# Altium PCB PCB1.PcbDoc
Units mil, origin at the board's own origin, x right, y up, seen from the top; angles counter-clockwise.
Board outline 3838.58 x 3838.58 mil, 2 copper layers (Top Layer, Bottom Layer); 135 components, 91 nets, 373 pads, 33 vias.
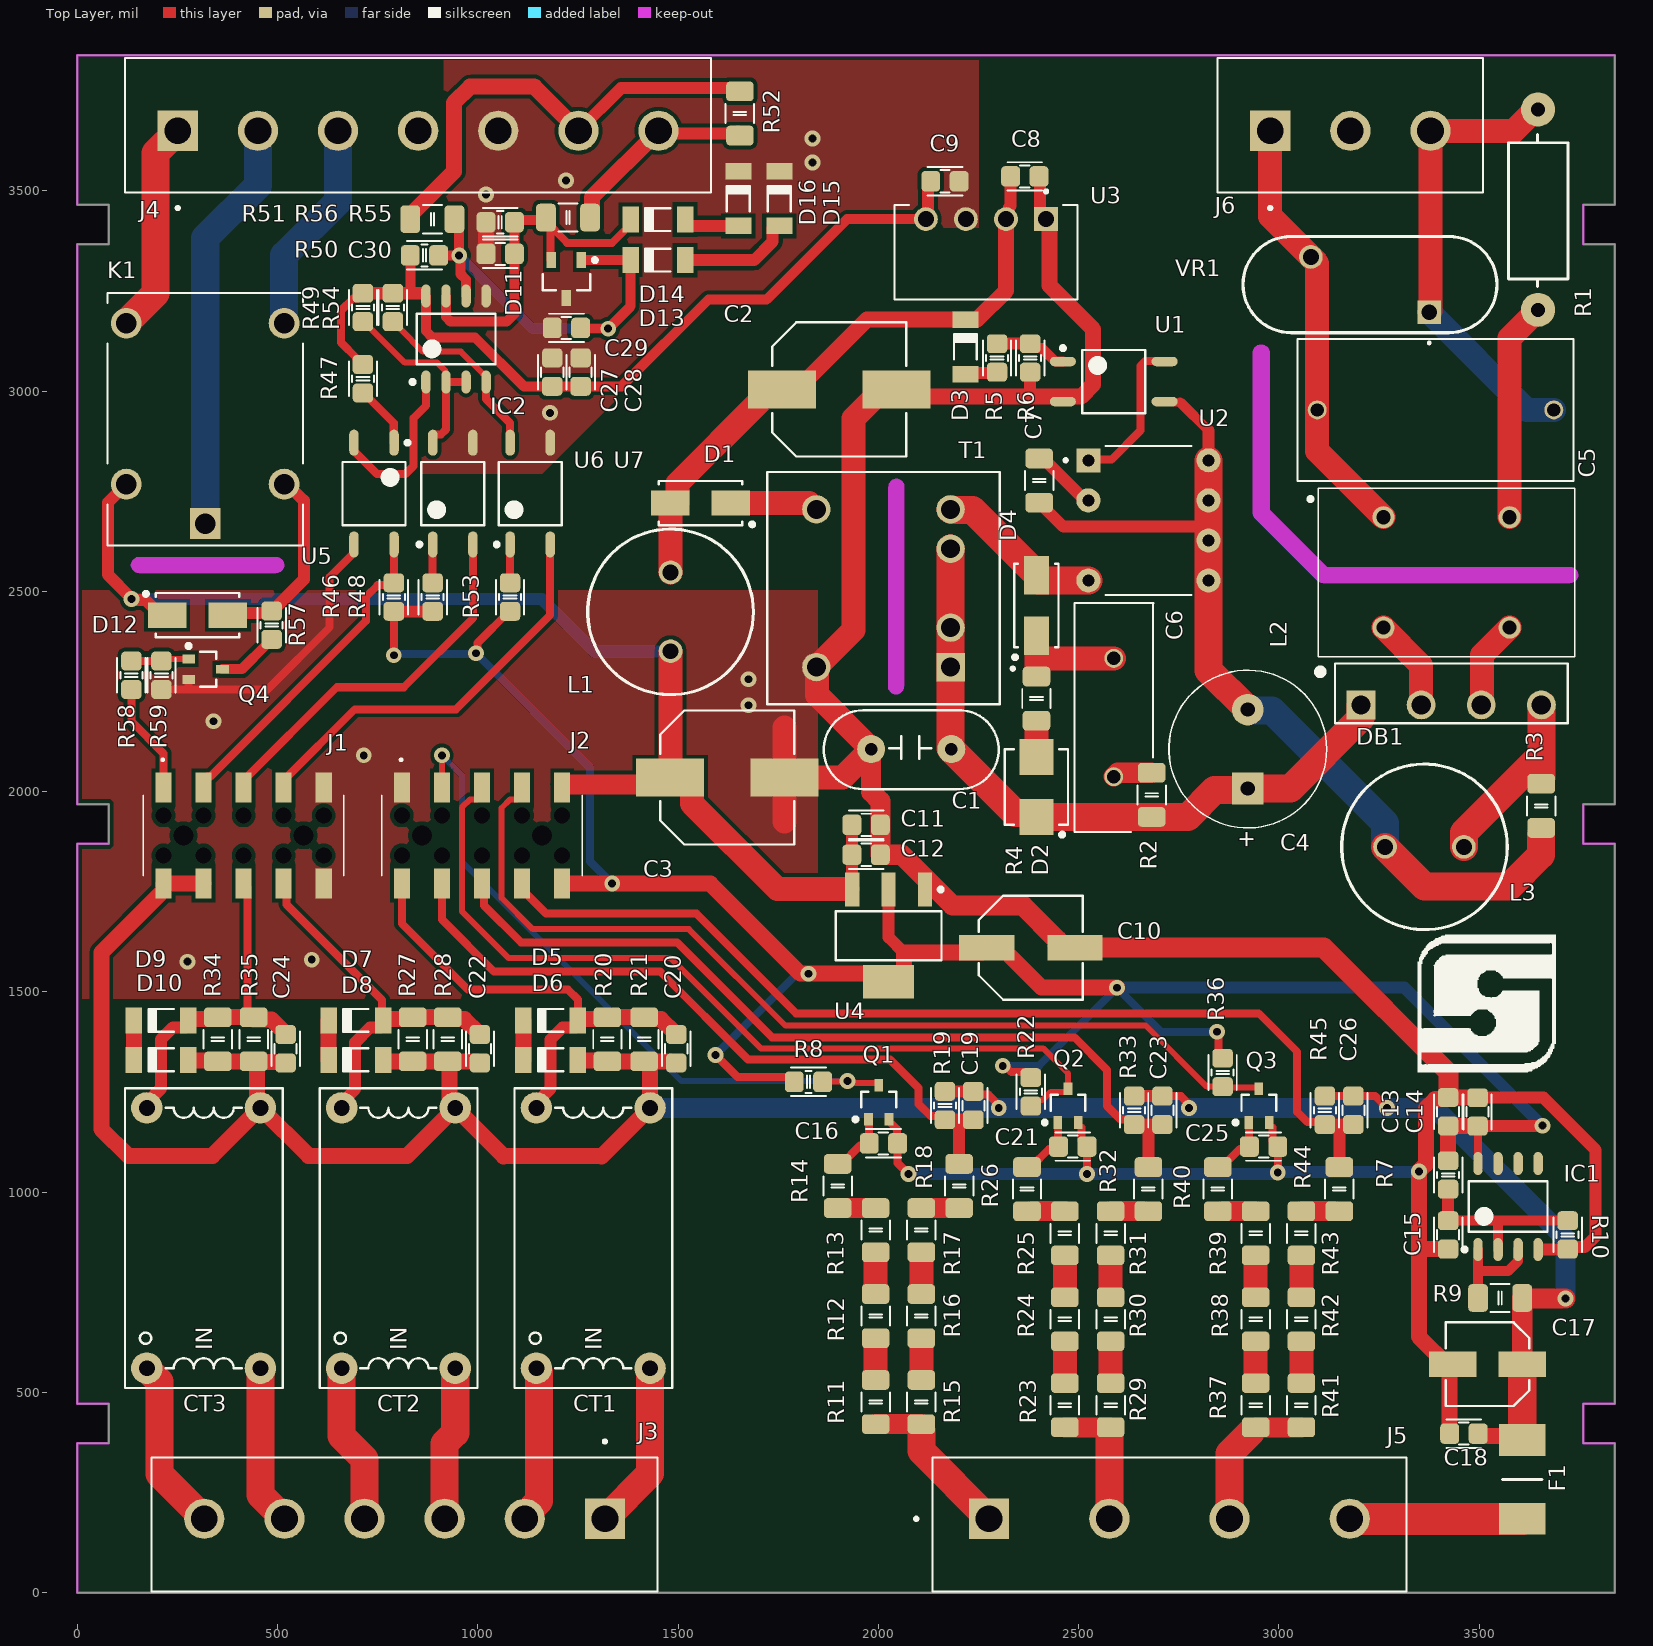
[diagram p0: Top Layer view]
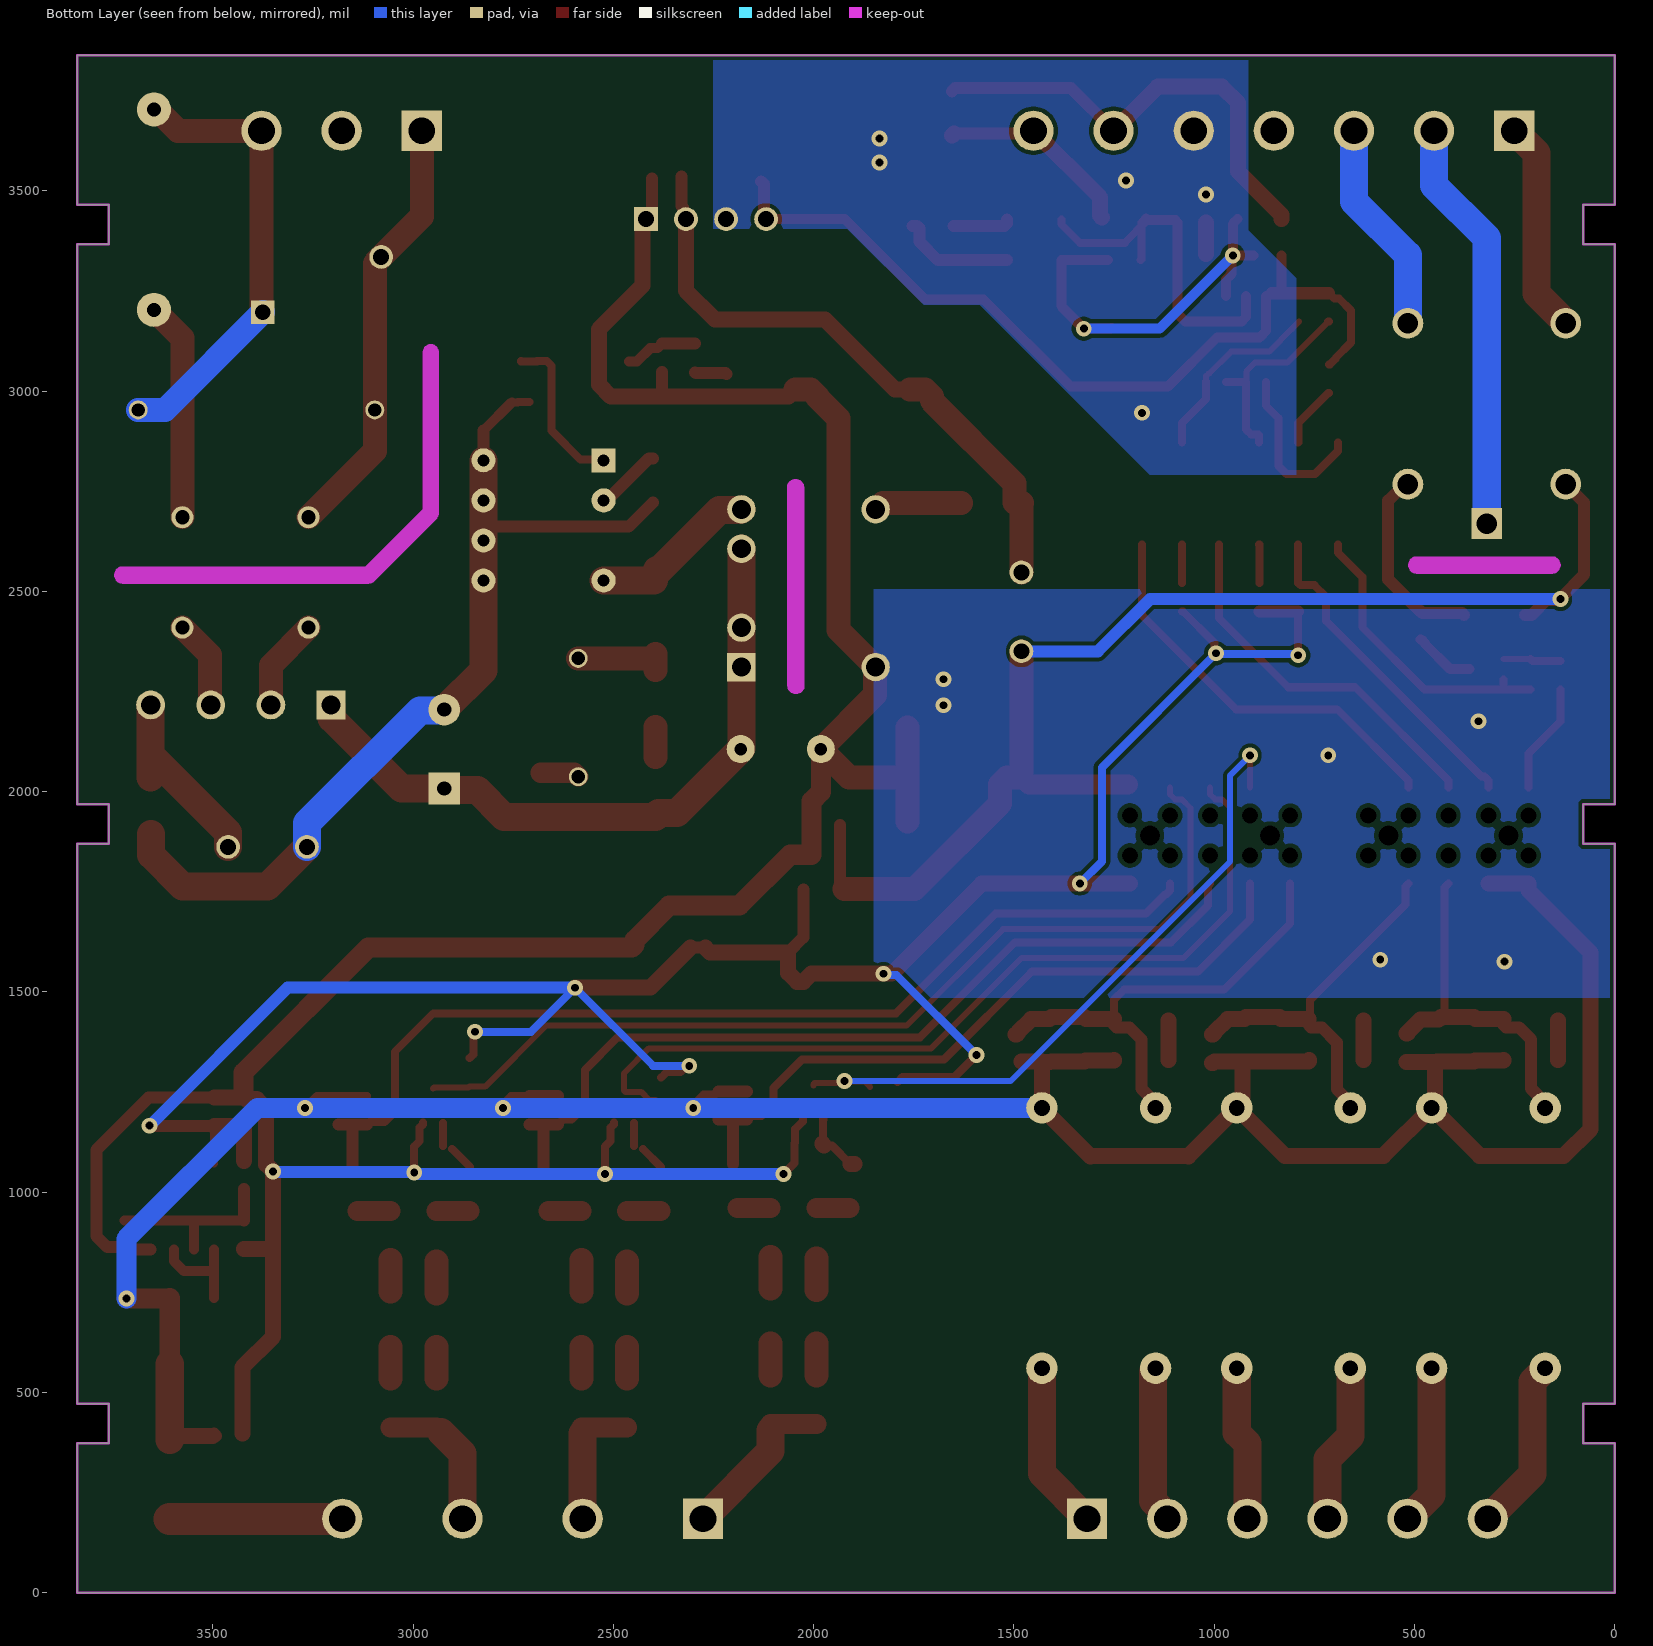
[diagram p1: Bottom Layer view, seen from below]
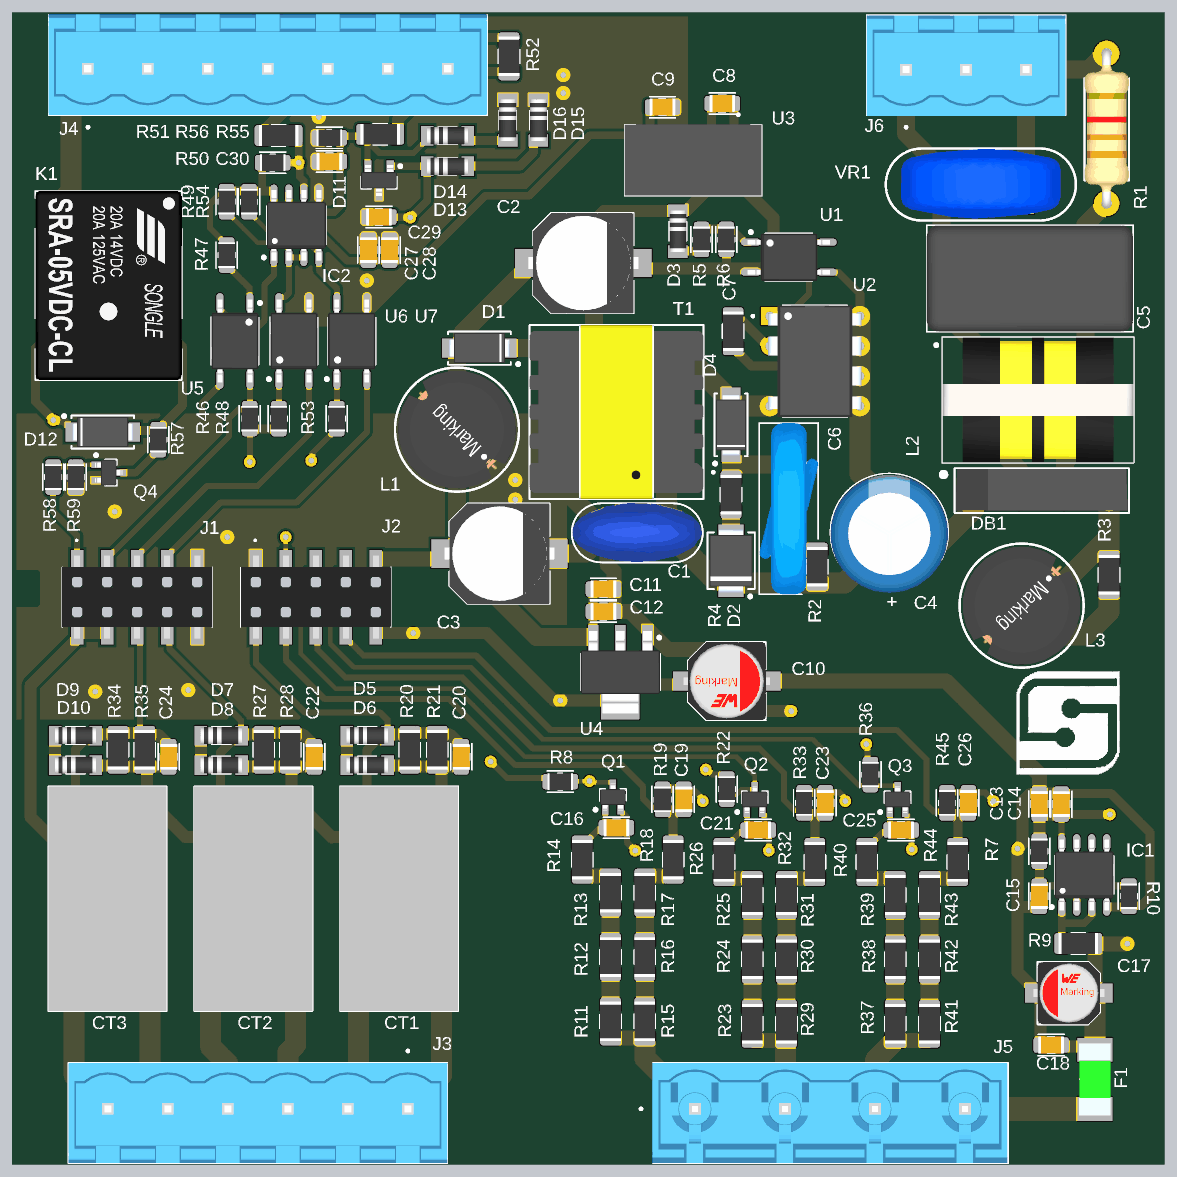
[diagram p2: 3D render of the assembled board from above, using the file's embedded part models]

## Layer stack, top to bottom
Top Solder: solder mask 0.4, Solder Resist, Dk 3.5
Top Layer: signal copper 1.4
Dielectric 1: dielectric 12.6, FR-4, Dk 4.8
Bottom Layer: signal copper 1.4
Bottom Solder: solder mask 0.4, Solder Resist, Dk 3.5

## Board outline
0,374.02 78.74,374.02 78.74,472.44 0,472.44 0,1870.08 78.74,1870.08 78.74,1968.5 0,1968.5 0,3366.14 78.74,3366.14 78.74,3464.57 0,3464.57 0,3838.58 3838.58,3838.58 3838.58,3464.57 3759.84,3464.57 3759.84,3366.14 3838.58,3366.14 3838.58,1968.5 3759.84,1968.5 3759.84,1870.08 3838.58,1870.08 3838.58,472.44 3759.84,472.44 3759.84,374.02 3838.58,374.02 3838.58,0 0,0
cut-out: 2024.28,2263.82 ccw(c2044.29,2263.78) 2064.31,2263.74 2065.29,2759.8 2065.29,2759.84 ccw(c2045.28,2759.84) 2025.26,2759.88
cut-out: 155.63,2545.61 cw(c155.63,2565.63) 155.63,2585.64 495.63,2585.64 cw(c495.63,2565.63) 515.64,2565.63 cw(c495.63,2565.63) 495.63,2545.61
cut-out: 2941.51,2681.44 cw(c2955.63,2695.63) 2935.61,2695.63 2935.61,3095.63 cw(c2955.63,3095.63) 2975.64,3095.63 2975.64,2703.92 3118.92,2560.64 3725.63,2560.64 cw(c3725.63,2540.63) 3745.64,2540.63 cw(c3725.63,2540.63) 3725.63,2520.61 3110.63,2520.61 cw(c3110.63,2540.63) 3096.44,2526.51 3096.48,2526.48

## Design rules (kind name [scope] priority, off if disabled: settings)
Clearance [All] p1: gap=10 ignorepadtopadclearanceinfootprint=FALSE
MinimumSolderMaskSliver [All] p1: minsoldermaskwidth=5
PolygonConnect [All] p1: connectstyle=Direct reliefconductorwidth=20 reliefentries=4 polygonreliefangle="90 Angle" airgapwidth=10
RoutingVias [All] p1: holewidth=19.68 width=39.37 viastyle="Through Hole" minholewidth=19.68 minwidth=35.43 maxholewidth=19.68 maxwidth=39.37
SilkToSilkClearance [All] p1: silktosilkclearance=3
SilkToSolderMaskClearance [IsPad] p1: minsilkscreentomaskgap=3 clearancetoexposedcopper=TRUE
SolderMaskExpansion [All] p1: expansion=4 istentingtop=FALSE
SupplyNets "Schematic Supply Nets_5" [InNet('+5V')] p1: voltage=0.000
SupplyNets "Schematic Supply Nets_4" [InNet('N')] p2: voltage=0.000
SupplyNets "Schematic Supply Nets_3" [InNet('GND')] p3: voltage=0.000
SupplyNets "Schematic Supply Nets_2" [InNet('+5V_RS485')] p4: voltage=0.000
SupplyNets "Schematic Supply Nets_1" [InNet('GND_RS485')] p5: voltage=0.000
SupplyNets "Schematic Supply Nets" [InNet('+3.3V')] p6: voltage=0.000
Width [All] p1: maxlimit=100 minlimit=10 preferedwidth=40 toplayer_prefwidth=20 minimp=50.000000 maximp=50.000000 favimp=50.000000
27 further rules are at their usual default settings.

## Classes and differential pairs
component class Sheet5: C27 C28 C29 C30 D11 D12 D13 D14 D15 D16 IC2 J1 J2 J3 J4 J5 J6 K1 Q4 R46 R47 R48 R49 R50 R51 R52 R53 R54 R55 R56 R57 R58 R59 U5 U6 U7
component class Sheet3: C15 C16 C17 C18 C19 C20 CT1 D5 D6 F1 IC1 Q1 R7 R8 R9 R10 R11 R12 R13 R14 R15 R16 R17 R18 R19 R20 R21
component class Sheet4: C21 C22 C23 C24 C25 C26 CT2 CT3 D7 D8 D9 D10 Q2 Q3 R22 R23 R24 R25 R26 R27 R28 R29 R30 R31 R32 R33 R34 R35 R36 R37 R38 R39 R40 R41 R42 R43 R44 R45
component class Sheet2: C1 C2 C3 C4 C5 C6 C7 C8 C9 C10 C11 C12 C13 C14 D1 D2 D3 D4 DB1 L1 L2 L3 R1 R2 R3 R4 R5 R6 T1 U1 U2 U3 U4 VR1

## Components (designator, comment, footprint, x,y, rotation, side; value= is the part's Value field where it differs from the comment)
C1 "2.2n/2KV" CN2-B 2082.09,2111.3 r0 top
C2 "330u/6.3V" CAPAE9383X105M 1902.56,3003.94 r0 top
C3 "330u/6.3V" CAPAE9383X105M 1623.03,2035.43 r0 top
C4 "10u/450V" CA-ALU-10BL 2922.24,2106.3 r90 top
C5 "0.1u/660V" CAPRR1500W60L1750T900H1600 3390.75,2952.76 r0 top
C6 "10n/2KV" CAPRB750W60L1450T500H1850 2587.6,2185.04 r270 top
C7 "0.1u/50V" RES_C_3216X70 2401.57,2776.57 r90 top
C8 "4.7u/6.3V" CAP_C_2012X110 2365.63,3535.63 r180 top
C9 "10u/6.3V" CAP_C_2012X110 2166.34,3523.62 r180 top
C10 "100u/6.3V" CAP-ALU-SMD-6.3x7.7x2.2 2380.63,1610.63 r0 top
C11 "10u/6.3V" CAP_C_2012X110 1969.49,1917.32 r180 top
C12 "0.1u/6.3V" CAP_C_2012X110 1969.49,1842.52 r180 top
C13 "10u/6.3V" CAP_C_2012X110 3422.24,1201.02 r270 top
C14 "0.1u/6.3V" CAP_C_2012X110 3495.63,1200.63 r270 top
C15 "0.1u/6.3V" CAP_C_2012X110 3422.25,893.7 r90 top
C16 "22n/16V" CAP_C_2012X110 2012.8,1122.05 r180 top
C17 "10u/6.3V" CAP-ALU-SMD-5x5.5x1.4 3520.67,570.87 r180 top
C18 "0.1u/6.3V" CAP_C_2012X110 3461.61,397.64 r180 top
C19 "22n/16V" CAP_C_2012X110 2237.2,1216.54 r270 top
C20 "22n/6.3V" CAP_C_2012X110 1495.63,1358.27 r90 top
C21 "22n/16V" CAP_C_2012X110 2485.21,1114.16 r180 top
C22 "22n/6.3V" CAP_C_2012X110 1005.63,1358.27 r90 top
C23 "22n/16V" CAP_C_2012X110 2709.19,1204.72 r270 top
C24 "22n/6.3V" CAP_C_2012X110 520.63,1358.27 r90 top
C25 "22n/16V" CAP_C_2012X110 2961.6,1114.16 r180 top
C26 "22n/16V" CAP_C_2012X110 3185.57,1204.72 r270 top
C27 "10u/6.3V" CAP_C_2012X110 1186.02,3047.24 r270 top
C28 "0.1u/6.3V" CAP_C_2012X110 1256.89,3047.24 r270 top
C29 "0.1n/16V" CAP_C_2012X110 1221.46,3157.48 r0 top
C30 "0.1n/16V" CAP_C_2012X110 1056.1,3342.51 r0 top
CT1 "ZHT107(5A/2.5mA)" ZHT107 1288.39,885.83 r90 top
CT2 "ZHT107(5A/2.5mA)" ZHT107 802.17,885.83 r90 top
CT3 "ZHT107(5A/2.5mA)" ZHT107 315.94,885.83 r90 top
D1 "DS_0.85V_100V_2A" DIOM5025X26N 1556.1,2720.47 r180 top
D2 "DZ_150V_600W" DIOM4436X26N 2394.68,2011.81 r270 top
D3 "DZ_4V" LL-34 2217.52,3110.24 r270 top
D4 "DR_1KV_2A" DIOM5025X26N 2394.68,2464.57 r90 top value=1N5007
D5 "DZ_2.2V" LL-34 1182.09,1429.13 r0 top
D6 "DZ_2.2V" LL-34 1182.09,1330.71 r0 top
D7 "DZ_2.2V" LL-34 695.87,1429.13 r0 top
D8 "DZ_2.2V" LL-34 695.87,1330.71 r0 top
D9 "DZ_2.2V" LL-34 209.65,1429.13 r0 top
D10 "DZ_2.2V" LL-34 209.65,1330.71 r0 top
D11 "SM712-02HTG" SOT95P237X112-3N 1221.46,3279.53 r270 top
D12 "DR_1KV_1A" DIOM5025X26N 300.63,2440.63 r0 top value=1N5007
D13 "DZ_12V" LL-34 1449.8,3326.77 r0 top
D14 "DZ_12V" LL-34 1449.8,3428.15 r0 top
D15 "DZ_7V" LL-34 1752.95,3480.31 r270 top
D16 "DZ_7V" LL-34 1650.59,3480.31 r270 top
DB1 "Diode Bridge" "diode bridge 2A" 3429.92,2216.54 r0 top value="Cau 1A"
F1 "F_1A" FUSC6127X294N 3607.28,283.46 r90 top value=Fuse
IC1 "LM358DT" SOIC-8 3571.85,964.57 r90 top value=LM358
IC2 "MAX485" SOIC-8 945.87,3129.92 r90 top
J1 "SSM-105-S-DV" SSM-105-XXX-DV-BE 415.63,1890.65 r180 top
J2 "SSM-105-S-DV" SSM-105-XXX-DV-BE 1010.63,1890.65 r180 top
J3 "TBP01R2-508-06BE" CUI_TBP01R2-508-06BE 1317.52,185.04 r180 top
J4 "TBP01R2-508-07BE" CUI_TBP01R2-508-07BE 251.38,3649.61 r0 top
J5 "TBP05R2-762-04BE" CUI_TBP05R2-762-04BE 2276.57,185.04 r0 top
J6 "TBP01R2-508-03BE" CUI_TBP01R2-508-03BE 3178.15,3649.61 r0 top
K1 "SRA-05VDC-CL" RELAY_SRA-05VDC-CL 319.88,2929.13 r90 top
L1 "10uH/2A" L-DIP-M-10 1481.3,2448.82 r90 top value="150 mH"
L2 "10mH" UU98LFH142LF 3418.31,2547.24 r0 top
L3 "1mH/100mA" L-DIP-M-10 3363.19,1862.2 r180 top value="150 mH"
Q1 "BC846BW" SOT-323 2000.98,1224.41 r90 top
Q2 "BC846BW" SOT-323 2473.4,1216.53 r90 top
Q3 "BC846BW" SOT-323 2949.79,1216.53 r90 top
Q4 "BC817W" SOT-323 320.63,2305.63 r0 top
R1 "6R8/5%/1W" RES-1W 3646.65,3452.76 r270 top
R2 "100R/1%" RES_C_3216X70 2682.09,1992.13 r90 top
R3 "1K/1%" RES_C_3216X70 3654.53,1964.57 r90 top
R4 "1K/1%" RES_C_3216X70 2394.68,2232.28 r90 top
R5 "330R/1%" RES_C_2012X65 2296.26,3082.68 r90 top
R6 "2K2/5%" RES_C_2012X65 2378.94,3082.68 r270 top
R7 "18K/1%" RES_C_2012X65 3422.24,1043.31 r270 top
R8 "5K1/1%" RES_C_2012X65 1825.63,1275.63 r0 top
R9 "33R/1%" RES_C_3216X70 3552.17,736.22 r0 top
R10 "15K/1%" RES_C_2012X65 3720.63,893.7 r270 top
R11 "120K/1%" RES_C_3216X70 1993.11,476.38 r270 top
R12 "120K/1%" RES_C_3216X70 1993.11,690.94 r270 top
R13 "120K/1%" RES_C_3216X70 1993.11,905.51 r270 top
R14 "120K/1%" RES_C_3216X70 1898.62,1015.75 r270 top
R15 "330K/1%" RES_C_3216X70 2107.28,476.38 r270 top
R16 "220K/1%" RES_C_3216X70 2107.28,690.94 r270 top
R17 "220K/1%" RES_C_3216X70 2107.28,905.51 r270 top
R18 "220K/1%" RES_C_3216X70 2201.77,1015.75 r270 top
R19 "3K/1%" RES_C_2012X65 2166.34,1216.54 r90 top
R20 "330R/1%" RES_C_3216X70 1323.82,1381.89 r270 top
R21 "330R/1%" RES_C_3216X70 1415.63,1381.89 r270 top
R22 "5K1/1%" RES_C_2012X65 2380.63,1250.63 r270 top
R23 "120K/1%" RES_C_3216X70 2465.52,468.5 r270 top
R24 "120K/1%" RES_C_3216X70 2465.52,683.06 r270 top
R25 "120K/1%" RES_C_3216X70 2465.52,897.63 r270 top
R26 "120K/1%" RES_C_3216X70 2371.04,1007.87 r270 top
R27 "330R/1%" RES_C_3216X70 837.6,1381.89 r270 top
R28 "330R/1%" RES_C_3216X70 925.63,1381.89 r270 top
R29 "330K/1%" RES_C_3216X70 2579.7,468.5 r270 top
R30 "220K/1%" RES_C_3216X70 2579.7,683.06 r270 top
R31 "220K/1%" RES_C_3216X70 2579.7,897.63 r270 top
R32 "220K/1%" RES_C_3216X70 2674.19,1007.87 r270 top
R33 "3K/1%" RES_C_2012X65 2638.32,1204.72 r90 top
R34 "330R/1%" RES_C_3216X70 351.38,1381.89 r270 top
R35 "330R/1%" RES_C_3216X70 440.63,1381.89 r270 top
R36 "5K1/1%" RES_C_2012X65 2859.24,1299.2 r270 top
R37 "120K/1%" RES_C_3216X70 2941.91,468.5 r270 top
R38 "120K/1%" RES_C_3216X70 2941.91,683.06 r270 top
R39 "120K/1%" RES_C_3216X70 2941.91,897.63 r270 top
R40 "120K/1%" RES_C_3216X70 2847.43,1007.87 r270 top
R41 "330K/1%" RES_C_3216X70 3056.09,468.5 r270 top
R42 "220K/1%" RES_C_3216X70 3056.09,683.06 r270 top
R43 "220K/1%" RES_C_3216X70 3056.09,897.63 r270 top
R44 "220K/1%" RES_C_3216X70 3150.57,1007.87 r270 top
R45 "3K/1%" RES_C_2012X65 3114.71,1204.72 r90 top
R46 "330R/1%" RES_C_2012X65 790.63,2485.63 r90 top
R47 "560R/5%" RES_C_2012X65 713.58,3030.63 r90 top
R48 "330R/1%" RES_C_2012X65 887.63,2485.63 r90 top
R49 "560R/5%" RES_C_2012X65 713.58,3208.66 r90 top
R50 "2K2/5%" RES_C_2012X65 867.13,3338.58 r180 top
R51 "10R/1%" RES_C_3216X70 886.81,3429.13 r180 top
R52 "120R/1%" RES_C_3216X70 1654.53,3692.91 r90 top
R53 "330R/1%" RES_C_2012X65 1080.63,2485.63 r90 top
R54 "560R/5%" RES_C_2012X65 788.39,3208.66 r90 top
R55 "10R/1%" RES_C_3216X70 1225.39,3433.07 r0 top
R56 "2K2/5%" RES_C_2012X65 1056.1,3421.26 r0 top
R57 "0R/1%" RES_C_2012X65 485.63,2415.63 r90 top
R58 "1K/1%" RES_C_2012X65 135.63,2290.63 r90 top
R59 "5.1K/1%" RES_C_2012X65 210.63,2290.63 r90 top
T1 "" BOBBIN_EE13/6/6 2012.8,2507.87 r180 top
U1 "TLP185" SOP254P700X220-4N 2587.6,3023.62 r0 top value=PC817
U2 "TNY278PN" IC_TNY274PN 2674.21,2677.17 r0 top
U3 "B0505S" B0505S-1W 2268.7,3346.46 r180 top
U4 "LM1117-3.3V" SOT230P700X180-4N 2025.63,1640.63 r270 top
U5 "TLP185" SOP254P700X220-4N 741.14,2744.09 r270 top value=PC817
U6 "TLP185" SOP254P700X220-4N 937.89,2744.09 r90 top value=PC817
U7 "TLP185" SOP254P700X220-4N 1130.91,2744.09 r90 top value=PC817
VR1 "470V/4.5KA" B72214P2301K101 3375,3196.85 r180 top

## Footprints (in the part's own frame and the unit in brackets; to place one, negate y for a bottom-side part, rotate by r counter-clockwise, add the part's x,y. Pads: shape width x height; smd on the part's side, far side on the other; paste and mask are expansions set on the pad)
B0505S-1W [mm]
  rect 1.508x1.508 / inner round 1.508 / far side rect 1.508x1.508 hole 1: 1(-3.81,-2.1)
  round 1.508 hole 1: 2(-1.27,-2.1) 3(1.27,-2.1) 4(3.81,-2.1)
  silkscreen extent -5.8,-3.95 5.8,3, body extent -5.8,-3.01 5.8,2.99, height 10.16
B72214P2301K101 [mm]
  rect 1.5x1.5 hole 1: 1(0,0)
  round 1.5 hole 1: 2(7.5,-3.5)
  silkscreen extent -4.3,-4.8 11.8,2, body extent -3,-4.77 10.5,1.11, height 17.97
BOBBIN_EE13/6/6 [mm]
  rect 1.8x1.8 hole 1.2: 1(-4.255,5)
  round 1.8 hole 1.2: 2(-4.255,2.5) 4(-4.255,-2.5) 5(-4.255,-5) 6(4.255,-5) 10(4.255,5)
  silkscreen extent -8.3,-7.36 7.36,7.36, body extent -7.37,-7.37 7.37,7.37, height 15.24
CA-ALU-10BL [mm] "Polarized capacitors, Aluminum Electrolytic Capacitors, 2-Leads, Body 10x20x5x0.6"
  rect 2x2 hole 0.9: 1(-2.5,0)
  round 2 hole 0.9: 2(2.5,0)
  silkscreen extent -5,-5 5,5, body extent -5.13,-5 4.88,5, height 16.2
CAP-ALU-SMD-5x5.5x1.4 [mm]
  rect 3x1.6 smd: 1(-2.2,0) 2(2.2,0)
  silkscreen extent -2.65,-2.65 2.65,2.65, body extent -3,-2.65 3,2.65, height 5.45
CAP-ALU-SMD-6.3x7.7x2.2 [mm]
  rect 3.5x1.6 smd: 1(-2.8,0) 2(2.8,0)
  silkscreen extent -3.3,-3.3 3.3,3.3, body extent -3.65,-3.3 3.65,3.3, height 7.65
CAP_C_2012X110 [mm]
  rrect41% 1.2x1.3 smd: 1(-0.9,0) 2(0.9,0)
  silkscreen extent -1.1,-0.9 1.1,0.9, body extent -1.1,-0.72 1.1,0.72, height 1.1
CAPAE9383X105M [mm] "Aluminum Electrolytic Capacitor, Body 8.30x8.30x10.50mm, IPC Low Density"
  rect 4.3x2.4 smd: 1(-3.625,0) 2(3.625,0)
  silkscreen extent -4.25,-4.25 4.25,4.25, body extent -4.65,-4.25 4.65,4.25, height 10.5
CAPRB750W60L1450T500H1850 [mm] "Cap 2KV ptich 7.5mm"
  round 1.2 hole 0.85: 1(-3.75,0) 2(3.75,0)
  silkscreen extent -7.25,-2.5 7.25,2.5, body extent -7.25,-2.5 7.25,2.5, height 18.5
CAPRR1500W60L1750T900H1600 [mm]
  round 1.2 hole 0.85: 1(-7.5,0) 2(7.5,0)
  silkscreen extent -8.75,-4.5 8.75,4.5, body extent -8.75,-4.5 8.75,4.5, height 16
CN2-B [mil]
  round 70 hole 31: 1(-100,-5) 2(100,-5)
  silkscreen extent -218,-105 218,92, body extent -217,-103 216,93, height 492
CUI_TBP01R2-508-03BE [mm]
  rect 2.55x2.55 / inner round 2.55 / far side rect 2.55x2.55 hole 1.7: 1(-5.08,0)
  round 2.55 hole 1.7: 2(0,0) 3(5.08,0)
  silkscreen extent -8.42,-5 8.42,4.6, body extent -8.42,-3.93 8.42,4.57, height 12.1
CUI_TBP01R2-508-06BE [mm]
  rect 2.55x2.55 / inner round 2.55 / far side rect 2.55x2.55 hole 1.7: 1(0,0)
  round 2.55 hole 1.7: 2(5.08,0) 3(10.16,0) 4(15.24,0) 5(20.32,0) 6(25.4,0)
  silkscreen extent -3.34,-5 28.74,4.6, body extent -3.34,-3.9 28.74,4.6, height 12.1
CUI_TBP01R2-508-07BE [mm]
  rect 2.55x2.55 / inner round 2.55 / far side rect 2.55x2.55 hole 1.7: 1(0,0)
  round 2.55 hole 1.7: 2(5.08,0) 3(10.16,0) 4(15.24,0) 5(20.32,0) 6(25.4,0) 7(30.48,0)
  silkscreen extent -3.34,-5 33.82,4.6, body extent -3.36,-3.85 33.8,4.65, height 12.1
CUI_TBP05R2-762-04BE [mm]
  rect 2.55x2.55 / inner round 2.55 / far side rect 2.55x2.55 hole 1.7: 1(0,0)
  round 2.55 hole 1.7: 2(7.62,0) 3(15.24,0) 4(22.86,0)
  silkscreen extent -4.72,-4.6 26.46,3.9, body extent -3.66,-4.6 26.4,3.9, height 12
"diode bridge 2A" [mm]
  rect 1.83x1.83 / inner round 1.83 / far side rect 1.83x1.83 hole 1.22: 1(-5.715,0)
  round 1.83 hole 1.22: 2(5.715,0) 3(1.905,0) 4(-1.905,0)
  silkscreen extent -8.5,-1.17 7.4,2.63, body extent -7.25,-0.95 7.25,2.55, height 12.8
DIOM4436X26N [mm] "Molded Diode, 2-Leads, Body 4.40x3.62mm, IPC Medium Density"
  rect 2.3x2.15 smd: 1(-1.9,0) 2(1.9,0)
  silkscreen extent -2.4,-2 3.15,2, body extent -2.67,-1.81 2.67,1.81, height 2.65
DIOM5025X26N [mm] "Molded Diode, 2-Leads, Body 5.00x2.50mm, IPC Medium Density"
  rect 2.45x1.6 smd: 1(1.925,0) 2(-1.925,0)
  silkscreen extent -3.4,-1.4 2.65,1.47, body extent -2.57,-1.28 2.57,1.28, height 2.5
FUSC6127X294N [mm]
  rect 2.02x2.95 smd: 1(-2.5,0) 2(2.5,0)
  silkscreen extent 0,-1.24 0,1.24, body extent -3.05,-1.35 3.05,1.35, height 2.94
IC_TNY274PN [mil]
  rect 60x60 / inner round 60 / far side rect 60x60 hole 30: 1(-150,150)
  round 60 hole 30: 2(-150,50) 4(-150,-150) 5(150,-150) 6(150,-50) 7(150,50) 8(150,150)
  silkscreen extent -211,-186 107,186, body extent -156,-186 156,186, height 160
L-DIP-M-10 [mm] "THT Inductor, 2-Leads, Body 10,0  mm"
  round 1.5 hole 1: 1(-2.5,0) 2(2.5,0)
  silkscreen extent -5.25,-5.25 5.25,5.25, body extent -4.99,-5 4.99,5, height 14.1
LL-34 [mm] "MELF Diode, 2-Leads, Body 3.50x1.45mm, IPC Medium Density"
  rect 1.05x1.65 smd: 1(-1.725,0) 2(1.725,0)
  silkscreen extent -0.8,-0.72 0.8,0.73, body extent -1.75,-0.72 1.75,0.72, height 1.45
RELAY_SRA-05VDC-CL [mm]
  round 1.95 hole 1.3: COIL1(-4.1,5) COIL2(-4.1,-5) NC(6.1,5) NO(6.1,-5)
  rect 1.95x1.95 / inner round 1.95 / far side rect 1.95x1.95 hole 1.3: COM(-6.6,0)
  silkscreen extent -8,-6.2 8,6.2, body extent -8,-6.2 8,6.2, height 14
RES-1W [mil]
  round 85 hole 35: 1(-250,0) 2(250,0)
  silkscreen extent -188,-74 192,75, body extent -265,-74 265,74, height 189
RES_C_2012X65 [mm]
  rrect41% 1.2x1.3 smd: 1(-0.9,0) 2(0.9,0)
  silkscreen extent -1.1,-0.9 1.1,0.9, body extent -1.07,-0.7 1.07,0.7, height 0.65
RES_C_3216X70 [mm]
  rrect39% 1.25x1.75 smd: 1(-1.4,0) 2(1.4,0)
  silkscreen extent -0.6,-0.9 0.6,0.9, body extent -1.68,-0.87 1.68,0.87, height 0.71
SOIC-8 [mm] "SOIC, 8-Leads, Body 4.91x3.90mm, Pitch 1.27mm, IPC Medium Density"
  oval 1.45x0.6 smd: 1(-2.725,1.905) 2(-2.725,0.635) 3(-2.725,-0.635) 4(-2.725,-1.905) 5(2.725,-1.905) 6(2.725,-0.635) 7(2.725,0.635) 8(2.725,1.905)
  silkscreen extent -2.85,-2.5 1.6,2.88, body extent -3,-2.5 3,2.5, height 1.75
SOP254P700X220-4N [mm] "SOP, 4-Leads, Body 3.75x4.60mm, Pitch 2.54mm, IPC Medium Density"
  oval 1.65x0.6 smd: 1(-3.225,1.27) 2(-3.225,-1.27) 3(3.225,-1.27) 4(3.225,1.27)
  silkscreen extent -3.35,-2 2,2.24, body extent -3.5,-2 3.5,2, height 2.2
SOT95P237X112-3N [mm] "SOT23, 3-Leads, Body 2.92x2.37mm, Pitch 0.95mm, IPC Medium Density"
  rect 1x0.6 smd: 1(-1.2,0.95) 2(-1.2,-0.95) 3(1.2,0)
  silkscreen extent -1.32,-1.5 0.7,1.93, body extent -1.32,-1.52 1.32,1.52, height 1.12
SOT230P700X180-4N [mm] "SOT223, 4-Leads, Body 6.50x7.00mm (avg), Pitch 2.30mm, IPC Medium Density"
  rect 2.15x0.9 smd: 1(-2.925,2.3) 2(-2.925,0) 3(-2.925,-2.3)
  rect 2.15x3.25 smd: 4(2.925,0)
  silkscreen extent -3.05,-3.35 1.55,3.43, body extent -3.5,-3.35 3.5,3.35, height 1.8
SOT-323 [mm] "SOT23, 3-Leads, Body 2.00x2.10mm, Pitch 0.65mm, IPC Medium Density"
  rect 0.8x0.55 smd: 1(-1.075,0.65) 2(-1.075,-0.65) 3(1.075,0)
  silkscreen extent -1.2,-1.1 0.67,1.6, body extent -1.15,-1.1 1.15,1.1, height 1.1
SSM-105-XXX-DV-BE [mm]
  rect 1.02x1.905 smd: 1(5.08,-3.047) 2(5.08,3.047) 3(2.54,-3.047) 4(2.54,3.047) 5(0,-3.047) 6(0,3.047) 7(-2.54,-3.047) 8(-2.54,3.047) 9(-5.08,-3.047) 10(-5.08,3.047)
  round 0.51 hole 1.02 unplated: 11(5.08,-1.27) 12(5.08,1.27) 13(2.54,-1.27) 14(2.54,1.27) 15(0,-1.27) 16(0,1.27) 17(-2.54,-1.27) 18(-2.54,1.27) 19(-5.08,-1.27) 20(-5.08,1.27)
  round 0.635 hole 1.27 unplated: 21(3.81,0) 22(-3.81,0)
  silkscreen extent -6.35,-4.85 6.35,2.54, body extent -6.35,-3.52 6.35,3.52, height 7.39
UU98LFH142LF [mm]
  round 1.4 hole 0.9: 1(-4,3.5) 2(-4,-3.5) 3(4,-3.5) 4(4,3.5)
  silkscreen extent -8.75,-5.33 8.13,5.33, body extent -8.08,-5.3 8.08,5.3, height 15.3
ZHT107 [mm]
  round 2 hole 1: 1(-8.25,3.6) 2(-8.25,-3.6) 3(8.25,3.6) 4(8.25,-3.6)
  silkscreen extent -9.51,-5.01 9.49,4.99, body extent -9.5,-5 9.5,5, height 18.5

## Part data
C1 C5 C6 C7 C8 C9 C11 C12 C13 C14 C15 C16 C18 C19 C20 C21 C22 C23 C24 C25 C26 C27 C28 C29 C30: library part CAP_SMD
C2 C3: library part CAP_POLAR, LCSC Part #=C19606
C4 C10 C17: library part CAP_POLAR
CT1 CT2 CT3: library part ZHT-107, "C5183046"
D1: library part "DIODE schottky", "Schottky"
D2 D3 D5 D6 D7 D8 D9 D10 D13 D14 D15 D16: library part "DIODE Zener", "Zenner"
D4 D12: library part Diode, "Default Diode", Code - JEDEC=DO-214-AB, Published=8-Jun-2000, Publisher="Altium Limited", Revision="July-2002: Re-released for DXP Platform."
D11: "TVS Diode, SM712 Series, 31V Clamp, 600W Peak Pulse, Surface Mount, SOT23-3", Package="SOT-23 Littelfuse Inc.", Check_prices=https://www.snapeda.com/parts/SM712-02HTG/Littelfuse/view-part/?ref=eda, MF="Littelfuse Inc.", MP=SM712-02HTG, SnapEDA_Link=https://www.snapeda.com/parts/SM712-02HTG/Littelfuse/view-part/?ref=snap
DB1: library part "DIODE BRIGDE", "Convert AC to DC voltage, 4 pin"
F1: library part Fuse, "Fuse", Designed by=VanDungEvn
IC1: library part LM258, "Low-Power Dual Operational Amplifier"
IC2: "RS232 - RS485 (Same sn75176)"
J1 J2: "Connector", Manufacturer_Name=SAMTEC, Mouser Part Number=200-SSM105SDV, Arrow Part Number=SSM-105-S-DV, Arrow Price/Stock=https://www.arrow.com/en/products/ssm-105-s-dv/samtec, Datasheet Link=https://mm.digikey.com/Volume0/opasdata/d220001/medias/docus/6129/ssm-1xx-xxx-dv-xx-xx-xxx-x-xx-mkt.pdf, Manufacturer_Part_Number=SSM-105-S-DV, Mouser Price/Stock=https://www.mouser.co.uk/ProductDetail/Samtec/SSM-105-S-DV?qs=XtX6y9BSeMiNY1vJI%2FFCQQ%3D%3D
J3: "2~24 Ð¿Ð¾Ð»ÑŽÑÐ°, Ð¿Ð¾Ð´ÐºÐ»ÑŽÑ‡Ð°ÐµÐ¼Ñ‹Ð¹, Ð²ÐµÑ€Ñ‚Ð¸ÐºÐ°Ð»ÑŒÐ½Ñ‹Ð¹, ÑˆÐ°Ð³ 5,08, ÐºÐ»ÐµÐ¼Ð¼Ð½Ñ‹Ð¹ Ð±Ð»Ð¾Ðº", Package=None, Check_prices=https://www.snapeda.com/parts/TBP01R2-508-06BE/Same+Sky/view-part/?ref=eda, MF="Same Sky", MP=TBP01R2-508-06BE, SnapEDA_Link=https://www.snapeda.com/parts/TBP01R2-508-06BE/Same+Sky/view-part/?ref=snap
J4 J6: "2~24 Poles, Pluggable, Receptacle, Vertical, 5.08 Pitch, Terminal Block Connector", Package=None, MF="Same Sky"
  J4: Check_prices=https://www.snapeda.com/parts/TBP01R2-508-07BE/Same+Sky/view-part/?ref=eda, MP=TBP01R2-508-07BE, SnapEDA_Link=https://www.snapeda.com/parts/TBP01R2-508-07BE/Same+Sky/view-part/?ref=snap
  J6: Check_prices=https://www.snapeda.com/parts/TBP01R2-508-03BE/Same+Sky/view-part/?ref=eda, MP=TBP01R2-508-03BE, SnapEDA_Link=https://www.snapeda.com/parts/TBP01R2-508-03BE/Same+Sky/view-part/?ref=snap
J5: "2~24 Poles, Pluggable, Receptacle, Vertical, 7.62 Pitch, Terminal Block Connector", Package=None, Check_prices=https://www.snapeda.com/parts/TBP05R2-762-04BE/Same+Sky/view-part/?ref=eda, MF="Same Sky", MP=TBP05R2-762-04BE, SnapEDA_Link=https://www.snapeda.com/parts/TBP05R2-762-04BE/Same+Sky/view-part/?ref=snap
K1: Package=Package, Check_prices=https://www.snapeda.com/parts/SRA-05VDC-CL/Songle+Relay/view-part/?ref=eda, MF="Songle Relay", MP=SRA-05VDC-CL, SnapEDA_Link=https://www.snapeda.com/parts/SRA-05VDC-CL/Songle+Relay/view-part/?ref=snap
L1 L3: library part L-DIP-1, "Inductor"
L2: library part L-DIP-2, Manufacturer="Würth Elektronik eiSos GmbH", PartNo=744284100, ComponentLink1Description=Manufacturer, ComponentLink1URL=http://www.we-online.de, ComponentLink2Description=Datasheet, ComponentLink2URL=http://www.we-online.de/katalog/media/pdf/744284100.pdf, Created by="Christin Zierenner", Created Date="March 2012", Inductance=10mH
Q1 Q2 Q3 Q4: library part BJT_NPN
R1 R2 R3 R4 R5 R6 R7 R9 R10 R46 R47 R48 R49 R50 R51 R52 R53 R54 R55 R56 R57 R58 R59: library part Res-SMD, "Resistor", Manufacturer="Generic Components", Class=Passive, Published=08/06/2000, Publisher="Altium Hobart Technology Centre"
R8 R22 R36: library part Res-SMD, "Resistor", LCSC Part #=C26023, Manufacturer="Generic Components", Class=Passive, Published=08/06/2000, Publisher="Altium Hobart Technology Centre"
R11 R12 R13 R14 R23 R24 R25 R26 R37 R38 R39 R40: library part Res-SMD, "Resistor", LCSC Part #=C17908, Manufacturer="Generic Components", Class=Passive, Published=08/06/2000, Publisher="Altium Hobart Technology Centre"
R15 R29 R41: library part Res-SMD, "Resistor", LCSC Part #=C17929, Manufacturer="Generic Components", Class=Passive, Published=08/06/2000, Publisher="Altium Hobart Technology Centre"
R16 R17 R18 R30 R31 R32 R42 R43 R44: library part Res-SMD, "Resistor", LCSC Part #=C17956, Manufacturer="Generic Components", Class=Passive, Published=08/06/2000, Publisher="Altium Hobart Technology Centre"
R19 R33 R45: library part Res-SMD, "Resistor", LCSC Part #=C212458, Manufacturer="Generic Components", Class=Passive, Published=08/06/2000, Publisher="Altium Hobart Technology Centre"
R20 R21 R27 R28 R34 R35: library part Res-SMD, "Resistor", LCSC Part #=C912714, Manufacturer="Generic Components", Class=Passive, Published=08/06/2000, Publisher="Altium Hobart Technology Centre"
T1: library part Trans, "Off-Line Transformer WE-UNIT , L=2.5mH", Inductance=2.8mH, Input Voltage (AC)=85-265, Manufacturer="Würth Elektronik eiSos GmbH", Output Current (A)=0.25, Output Voltage (DC)=12, PartNo=7491181012, ComponentLink1Description=Manufacturer, ComponentLink1URL=http://www.we-online.de, ComponentLink2Description=Datasheet, ComponentLink2URL=http://www.we-online.de/katalog/media/pdf/7491181012.pdf, Created by="Otto Christin", Created Date="OCT 2013", Turns Ratio=8.1:1
U1 U5 U6 U7: "Single Opto"
U2: library part TNY284DG, Package=None, Availability=Unavailable, MP=TNY284DG, Price=None
U4: library part LM1117, "800mA Low-Dropout Linear Regulator", Creator="Nguyen Ba Bien", Website=http://group3i.net
VR1: library part Varistor, "MOV-14D471K, Varistors 470V 14mm"

## Via types
v1: diameter 39.37, hole 19.68, Top Layer to Bottom Layer, 33 vias

## Nets (pads, with @x,y where several pads share a name; then routed paths per layer and width w, separated by ;. In a path a pad name is that pad's centre, name@x,y a point inside that pad or via, vN(x,y) a via of type N, cw(c..) or ccw(c..) an arc to the next point about the centre after c; other vN are vias at no path point)
+3.3V: C10.1 C13.2 C14.2 IC1.8 J2.10 R7.1 R8.1 R22.1 R36.1 R46.1 R48.1 R53.1 U4.2 U4.4 | length 6018.3
  Top Layer w20: v1(790.63,2340.63) R46.1 ; v1(995.63,2345.63) 999.34,2349.34 999.34,2370.88 1078.65,2450.2 R53.1 ; v1(1593.5,1342.52) 1648.62,1287.4 1778.43,1287.4 R8.1 ; v1(1825.63,1545.63) v1@1825.63,1550.63 ; v1(2310.63,1315.63) 2315.87,1315.63 2331.82,1299.69 2367.01,1299.69 R22.1 ; v1(2845.63,1400.63) 2849.34,1396.92 2849.34,1344.54 R36.1 ; C14.2@3495.44,1165.39 3496.24,1164.59 3496.24,1072.46 IC1.8
  Top Layer w30: R46.1 R48.1 ; U4.2 2025.63,1636.62 2063.63,1598.63 ; C10.1 C10.1@2307.8,1610.63 ; C14.2@3495.44,1165.39 3495.81,1165.77 3656.91,1165.77 v1(3657.48,1166.34)
  Top Layer w40: J2.10 J2.10 v1(1335.63,1770.63) 1580.63,1770.63 1805.63,1545.63 v1(1825.63,1545.63) 2005.47,1545.63 U4.4 2041.3,1525.47 2063.63,1547.8 2063.63,1598.63 2198.06,1598.63 2198.57,1599.13 2258.9,1599.13 C10.1 ; C10.1@2307.8,1610.63 2407.8,1510.63 v1(2595.63,1510.63) ; R7.1 C13.2 3422.45,1165.39 C14.2@3495.44,1165.39
  Bottom Layer w20: v1(790.63,2340.63) 793.13,2343.13 993.13,2343.13 v1(995.63,2345.63) 1280.63,2060.63 1280.63,1825.63 v1(1335.63,1770.63) ; v1(1593.5,1342.52) 1792.91,1541.92 1821.92,1541.92 v1(1825.63,1545.63) ; v1(2310.63,1315.63) 2400.63,1315.63 v1(2595.63,1510.63) 2705.63,1400.63 v1(2845.63,1400.63)
  Bottom Layer w30: v1(2595.63,1510.63) 3313.19,1510.63 v1(3657.48,1166.34)
+5V: C3.1 C11.2 C12.2 D12.2 J2.9 K1.COIL1 L1.1 U4.3 | length 3171.3
  Top Layer w30: K1.COIL1 76.77,2721.46 76.77,2542.02 135.63,2483.17 v1(135.63,2480.63) 137.42,2478.84 169.9,2478.84 208.11,2440.63 D12.2 ; C11.2 C12.2 1934.16,1842.41 1934.16,1756.71 U4.3
  Top Layer w50: J2.9@1215.55,2018.21 1463.09,2018.21 C3.1
  Top Layer w60: L1.1 1481.3,2036.42 C3.1 1517.72,2035.43 1534.96,2018.19 1534.96,1969.96 1748.02,1756.9 U4.3@1922.8,1756.9
  Bottom Layer w30: v1(135.63,2480.63) 1160.63,2480.63 1290.87,2350.39 L1.1
+5V_RS485: C9.2 C27.2 C28.2 IC2.8 R47.2 R49.2 R50.2 R54.2 U3.4 | length 2135
  Top Layer w20: R47.2 711.61,3066.06 697.99,3079.69 697.99,3081.65 658.46,3121.17 658.46,3200.79 688.15,3230.47 699.95,3230.47 R49.2
  Top Layer w25: 831.69,3244.09 R50.2 ; IC2.8 870.87,3149.8 886.81,3133.86 993.11,3133.86 1115.16,3011.81 C27.2 C28.2 1359.25,3011.81 1575.79,3228.35 1721.46,3228.35 1922.24,3429.13 U3.4
  Top Layer w30: R49.2 R54.2 831.69,3244.09 857.58,3244.09 ; U3.4 2124.32,3434.75 2124.32,3517.03 C9.2
GND: C1.1 C2.2 C3.2 C8.1 C10.2 C11.1 C12.1 C13.1 C14.1 C15.1 C16.1 C17.2 C18.2 C21.1 C25.1 IC1.4 J1.9 J1.10 J2.1 Q1.2 Q2.2 Q3.2 Q4.2 R6.2 R10.2 R59.1 T1.10 U1.2 U3.1 U4.1 U5.3 | length 8881.6
  Top Layer w20: R59.1 278.31,2255.2 ; Q4.2 278.31,2255.2 ; U5.3 691.14,2596.46 630.63,2535.95 630.63,2410.63 475.2,2255.2 278.31,2255.2 ; Q1.2 2026.57,1177.17 2046.26,1157.48 2046.26,1124.01 C16.1 2048.23,1073.03 v1(2075.63,1045.63) ; Q2.2 2498.99,1169.28 2507.02,1161.25 2507.02,1127.78 C21.1 v1(2520.64,1045.64) ; Q3.2 2975.38,1169.28 2983.41,1161.25 2983.41,1127.78 C25.1 v1(2997.03,1049.23)
  Top Layer w30: 2378.94,2986.22 R6.2 ; C8.1@2404.1,3530.62 2404.1,3443.73 U3.1 ; C14.1 3660.2,1236.06 3790.63,1105.63 3790.63,890.63 3763,863 3725.36,863 R10.2 ; IC1.4@3655.63,857.28 3719.65,857.28 R10.2@3720.14,857.78
  Top Layer w40: C2.2 2062.99,2986.22 2378.94,2986.22 2505.91,2986.22 2536.42,3016.73 2536.42,3154.17 2427.38,3263.21 2427.38,3420.45 U3.1 ; C15.1 3351.38,858.27 3349.41,856.3 ; C13.1 3418.63,1232.83 3390.09,1232.83 3366.66,1209.4 3366.66,1069.42 v1(3349.41,1052.17) 3349.41,856.3 ; C13.1@3422.64,1236.06 C14.1 ; C18.2 3426.18,562.99 3349.41,639.76 3349.41,856.3
  Top Layer w50: C1.1 1982.09,1999.17 2004.92,1976.34 C11.1 C12.1 2058.75,1842.51 2185.63,1715.63 2360.63,1715.63 2446.97,1629.29 2446.97,1617.13 2453.46,1610.63 C10.2 3111.81,1610.63 3423.23,1299.21 C13.1@3423.23,1248.03
  Top Layer w60: 1765.75,1925.75 C3.2 ; 1765.75,2160.51 C3.2 ; C2.2 2007.87,3003.94 1990.63,2986.69 1990.63,2984.21 1937.99,2931.57 1937.99,2403.74 T1.10 1847.35,2308.94 1847.35,2241.03 C1.1 1911.22,2035.43 C3.2
  Bottom Layer w20: v1(2997.03,1049.23) v1@3000.63,1045.63
  Bottom Layer w30: v1(2075.63,1045.63) v1(2520.64,1045.64) v1@3000.63,1045.63 ; v1@3000.09,1048.94 3000.09,1049.43 3001.36,1050.7 3347.94,1050.7 v1(3349.41,1052.17)
  other v1: 275.63,1575.63 585.63,1580.63 715.63,2090.63 340.63,2175.63 1675.63,2215.63 1675.63,2280.63
GND_RS485: C9.1 C27.1 C28.1 C29.1 C30.1 D11.3 D15.1 D16.1 IC2.5 J4.5 R56.1 U3.3 U6.3 U7.3 | length 78.7
  Top Layer w40: C30.1 R56.1
  other v1: 1180.63,2945.63 1020.63,3490.63 1220.63,3525.63 1835.63,3570.63 1835.63,3630.63
ISOL_RE: IC2.2 IC2.3 R49.1 U6.4 | length 510.8
  Top Layer w15: R49.1@715.54,3173.23 817.91,3070.87 898.62,3070.87 920.17,3049.32 920.17,3023.33 IC2.2
  Top Layer w20: R49.1 R49.1@715.54,3173.23 ; U6.4 887.89,2889.29 889.57,2890.96 907.79,2890.96 920.87,2904.04 IC2.2 IC2.3
ISOL_RX: IC2.1 U5.2 | length 423.6
  Top Layer w20: U5.2 691.14,2850.39 748.35,2793.19 819.76,2793.19 839.57,2812.99 839.57,2932.19 870.87,2963.49 IC2.1
ISOL_TX: IC2.4 R54.1 U7.4 | length 480.2
  Top Layer w15: R54.1 789.08,3173.23 806.47,3155.84 806.47,3155.14 863.18,3098.43 957.68,3098.43 1012.42,3043.68 1014.22,3043.68 1020.17,3037.73 IC2.4@1020.17,3023.33
  Top Layer w20: IC2.4@1020.17,3023.33 IC2.4 1020.87,2980.12 1080.91,2920.08 U7.4
N: C17.1 C18.1 C19.1 C20.1 C22.1 C23.1 C24.1 C26.1 CT1.4 CT2.4 CT3.4 D6.2 D8.2 D10.2 F1.2 J1.2 J1.4 R9.2 R19.2 R20.2 R21.2 R27.2 R28.2 R33.2 R34.2 R35.2 R45.2 | length 7144
  Top Layer w20: C19.1 2245.59,1243.59 2274.7,1243.59 2296.92,1221.36 2296.92,1214.34 v1(2300.63,1210.63) ; C23.1 2754.97,1240.15 2771.92,1223.19 2771.92,1214.34 v1(2775.63,1210.63) ; R45.2@3115.17,1240.61 R45.2 C26.1 3240.17,1240.15 v1(3269.68,1210.63)
  Top Layer w30: R19.2 C19.1 ; R33.2 C23.1 ; C18.1@3491.3,391.88 C18.1 3497.05,395.66 C18.1@3500.67,392.04 ; F1.2@3597.13,392.04 F1.2
  Top Layer w40: D10.2 277.56,1329.41 278.23,1328.74 349.41,1328.74 R34.2 443.9,1326.77 448.5,1322.17 448.5,1230.29 457.68,1221.11 CT3.4 ; J1.4 J1.2 215.63,1753.25 60.63,1598.25 60.63,1157.95 127.95,1090.63 337.68,1090.63 CT3.4 ; R35.2@440.63,1325.51 C24.1@520.31,1325.51 ; D8.2 763.78,1327.44 764.45,1326.77 R27.2 925.51,1326.77 930.12,1322.17 930.12,1234.89 943.9,1221.11 CT2.4 ; R28.2 999.72,1326.77 1003.65,1322.83 C22.1 ; 1064.96,1089.57 CT2.4 ; 1064.96,1090.63 1309.06,1090.63 ; D6.2 1250,1329.41 1250.67,1328.74 1321.85,1328.74 R20.2 R21.2@1406.5,1326.77 ; 1309.06,1089.57 CT1.4 1430.12,1298.73 1430.08,1298.77 1430.08,1322.17 1426.73,1325.51 R21.2@1410.63,1325.51 ; R21.2@1430.12,1326.77 C20.1@1481.29,1326.77 ; C18.1@3500.67,392.04 F1.2@3597.13,392.04 ; CT3.4 577.68,1090.63 823.9,1090.63 CT2.4
  Top Layer w50: C17.1 R9.2 3607.28,735.63 3607.68,735.24 v1(3715.55,735.24)
  Top Layer w70: F1.2 C17.1
  Bottom Layer w50: CT1.4 v1(2300.63,1210.63) v1(2775.63,1210.63) v1(3269.68,1210.63) 3388.78,1210.63 3715.55,883.86 v1(3715.55,735.24)
NetC1_2: C1.2 C4.1 D2.2 DB1.1 R2.1 T1.1 T1.2 T1.4 | length 1730.1
  Top Layer w70: T1.4 T1.2 T1.1 2180.32,2108.07 2341.1,1947.28 2387.36,1947.28 2394.68,1939.96 D2.2 R2.1 2772.64,1937.01 2839.26,2003.63 2918,2003.63 C4.1 3028.54,2007.87 3203.9,2183.23 3203.9,2215.51 DB1.1
NetC2_1: C2.1 C8.2 D1.1 D3.1 L1.2 U3.2 | length 1553.9
  Top Layer w30: U3.2 2324.32,3434.75 2324.32,3455.52 2330.2,3461.39 C8.2
  Top Layer w40: C2.1 1797.24,3003.94 1971.46,3178.15 D3.1 2218.19,3178.82 2246.73,3178.82 2318.7,3250.79 U3.2
  Top Layer w60: D1.1 1497.05,2720.47 1498.54,2721.97 1498.54,2769.21 1705.2,2975.87 1705.2,2986.69 1722.44,3003.94 C2.1 ; L1.2 D1.1@1481.3,2719.49
NetC4_2: C4.2 C7.1 L3.2 R3.1 U1.3 U2.5 U2.6 U2.7 U2.8 | length 2362.7
  Top Layer w20: U1.3@2709.27,2972.44 2709.76,2972.93 2738.49,2972.93 2739.47,2971.95 2753.44,2971.95
  Top Layer w25: 2753.44,2971.95 2823.82,2901.57
  Top Layer w30: C7.1 2461.61,2661.42 2824.21,2661.42 ; 2823.82,2901.57 2823.82,2827.56 U2.8
  Top Layer w70: U2.8 U2.7 2824.21,2661.42 U2.6 U2.5 2824.21,2302.76 C4.2 ; L3.2 3363.19,1763.78 3575.79,1763.78 3654.53,1842.52 R3.1@3654.53,1893.7
  Bottom Layer w70: C4.2 2923.92,2203.05 2982.97,2203.05 3264.76,1921.26 L3.2
NetC5_1: C5.1 J6.1 L2.1 VR1.2 | length 1081.7
  Top Layer w60: J6.1 2978.15,3436.22 3095.47,3318.9 3095.47,2850.39 L2.1
NetC5_2: C5.2 J6.3 R1.1 VR1.1 | length 1156.7
  Top Layer w60: VR1.1 3378.15,3200 J6.3 3586.74,3649.61 3639.89,3702.76 R1.1
  Bottom Layer w60: VR1.1 3619.09,2952.76 C5.2
NetC6_1: C6.1 D4.2 R4.2 | length 238.4
  Top Layer w60: R4.2@2394.68,2303.15 2394.68,2344 2406,2332.68 C6.1
NetC6_2: C6.2 R2.2 | length 98.6
  Top Layer w50: C6.2 2597.44,2047.24 R2.2
NetC7_2: C7.2 U2.2 | length 165.9
  Top Layer w30: C7.2 2411.42,2831.69 2510.2,2732.91 2518.47,2732.91 U2.2
NetC15_2: C15.2 IC1.2 R7.2 R10.1 | length 449
  Top Layer w25: C15.2 3532.21,929.13 3546.85,929.13 ; IC1.2 3546.85,929.13 ; R10.1 3546.85,929.13
  Top Layer w30: C15.2 R7.2
NetC16_2: C16.2 Q1.1 R14.1 | length 162
  Top Layer w20: R14.1@1908.46,1070.87 1954.05,1116.45 C16.2@1973.74,1116.45 ; Q1.1 1976.22,1181.26 1976.22,1123.18 C16.2
  Top Layer w40: R14.1 R14.1@1908.46,1070.87 ; C16.2@1973.74,1116.45 1977.36,1120.07 C16.2
NetC19_2: C19.2 J2.4 R18.1 R19.1 | length 1753.3
  Top Layer w20: J2.4 910.63,1680.63 1040.63,1550.63 1455.63,1550.63 1674.45,1331.81 2029.45,1331.81 2100.63,1260.63 2100.63,1220.63 2130.31,1190.95 2156.48,1190.95 R19.1
  Top Layer w30: R19.1 C19.2 ; R18.1 2201.77,1177.16
NetC20_2: C20.2 CT1.3 D5.2 J2.2 R20.1 R21.1 | length 1203.9
  Top Layer w20: J2.2 810.63,1670.63 975.63,1505.63 1225.63,1505.63 1250,1481.26 D5.2
  Top Layer w30: CT1.3 1146.65,1223.82 1182.09,1259.25 1182.09,1381.89 1211.85,1411.65 1244.33,1411.65 1250,1417.32 D5.2
  Top Layer w40: D5.2@1250.67,1433.07 R20.1@1319.88,1433.07 ; R20.1 R21.1@1406.5,1437.01 ; R21.1@1411.1,1432.4 1456.92,1432.4 1490.03,1399.29 1490.03,1397.32 1493.65,1393.7 C20.2
NetC21_2: C21.2 Q2.1 R26.1 | length 122.5
  Top Layer w20: R26.1@2380.88,1062.98 C21.2@2426.46,1108.57 ; C21.2@2448.63,1115.3 Q2.1@2448.63,1173.38
NetC22_2: C22.2 CT2.3 D7.2 J1.8 R27.1 R28.1 | length 971
  Top Layer w20: J1.8 523.11,1763.19 523.11,1718.15 761.36,1479.9 761.36,1431.55 D7.2
  Top Layer w30: CT2.3 660.43,1223.82 693.9,1257.28 693.9,1374.02 731.54,1411.65 758.11,1411.65 763.78,1417.32 D7.2
  Top Layer w40: D7.2@764.45,1433.07 R27.1@833.66,1433.07 ; R27.1 R28.1@920.28,1437.01 ; R28.1@924.88,1432.4 966.92,1432.4 1000.03,1399.29 1000.03,1397.32 1003.65,1393.7 C22.2
NetC23_2: C23.2 J2.6 R32.1 R33.1 | length 2135.7
  Top Layer w20: J2.6 1015.86,1765.44 1015.86,1715.89 1108.62,1623.13 1497.93,1623.13 1734.25,1386.81 2489.45,1386.81 2570.63,1305.63 2570.63,1215.63 2604.71,1181.55 2626.04,1181.55 R33.1
  Top Layer w30: R33.1 C23.2 ; R32.1 2674.19,1169.28
NetC24_2: C24.2 CT3.3 D9.2 J1.6 R34.1 R35.1 | length 888
  Top Layer w20: J1.6 425.63,1760.67 425.63,1445.43 R35.1@434.05,1437.01
  Top Layer w30: CT3.3 174.21,1223.82 209.65,1259.25 209.65,1381.89 239.41,1411.65 271.89,1411.65 278.23,1417.99 D9.2@278.23,1433.07
  Top Layer w40: D9.2@278.23,1433.07 347.44,1433.07 R34.1 434.05,1437.01 439.92,1431.14 485.55,1431.14 515.03,1401.65 515.03,1399.69 518.65,1396.06 C24.2@520.62,1396.06
NetC25_2: C25.2 Q3.1 R40.1 | length 122.5
  Top Layer w20: R40.1@2857.27,1062.98 C25.2@2902.85,1108.57 ; C25.2@2925.02,1115.3 Q3.1@2925.02,1173.38
NetC26_2: C26.2 J2.8 R44.1 R45.1 | length 2528.4
  Top Layer w20: J2.8 1110.63,1753.25 1120.71,1743.17 1123.09,1743.17 1170.63,1695.63 1545.63,1695.63 1794.41,1446.85 2949.41,1446.85 3045.63,1350.63 3045.63,1200.63 3070.63,1175.63 3108.36,1175.63 R45.1
  Top Layer w30: R45.1 C26.2@3185.57,1169.28 ; R44.1 3150.58,1169.28
NetCT1_1: CT1.1 J3.2 | length 393.8
  Top Layer w70: J3.2 1117.52,193.26 1153.54,229.29 1153.54,551.77 1146.65,558.66 CT1.1
NetCT1_2: CT1.2 J3.1 | length 422.6
  Top Layer w70: J3.1 1430.12,297.64 CT1.2
NetCT2_1: CT2.1 J3.4 | length 397.3
  Top Layer w70: CT2.1@660.43,558.66 660.43,391.73 717.52,334.65 J3.4
NetCT2_2: CT2.2 J3.3 | length 384.5
  Top Layer w70: J3.3 917.52,373.23 943.9,399.61 CT2.2@943.9,558.66
NetCT3_1: CT3.1 J3.6 | length 435.3
  Top Layer w70: CT3.1 174.21,558.66 205.63,527.24 205.63,296.93 J3.6
NetCT3_2: CT3.2 J3.5 | length 400.8
  Top Layer w70: CT3.2 457.68,244.88 J3.5
NetD1_2: D1.2 T1.6 | length 219.9
  Top Layer w60: D1.2 1826.59,2720.47 1842.34,2704.72 T1.6
NetD2_1: D2.1 R4.1 | length 74.8
  Top Layer w60: D2.1 R4.1@2394.68,2161.42
NetD3_2: D3.2 R5.1 | length 80.1
  Top Layer w30: D3.2 2219.98,3044.78 2293.79,3044.78 R5.1@2295.76,3046.75
NetD4_1: D4.1 T1.5 U2.4 | length 399.5
  Top Layer w70: T1.5 2180.55,2704.72 2182.63,2702.65 2235.35,2702.65 2384.41,2553.58 D4.1@2391.18,2553.58 ; D4.1@2398.19,2527.17 U2.4
NetD5_1: D5.1 D6.1 | length 98.4
  Top Layer w40: D6.1 D5.1
NetD7_1: D7.1 D8.1 | length 98.4
  Top Layer w40: D8.1 D7.1
NetD9_1: D9.1 D10.1 | length 98.4
  Top Layer w40: D10.1 D9.1
NetD12_1: D12.1 K1.COIL2 R57.2 | length 487.7
  Top Layer w30: D12.1 381.63,2445.85 480.41,2445.85 R57.2 ; R57.2@487.59,2451.06 565.94,2529.42 565.94,2726.44 524.67,2767.72 K1.COIL2
NetD13_2: D13.2 D15.2 | length 290.6
  Top Layer w30: D13.2 1689.96,3326.77 1735.88,3372.69 1735.88,3406.73 1741.55,3412.4 D15.2
NetD14_2: D14.2 D16.2 | length 145.3
  Top Layer w30: D14.2 1517.72,3418.07 1523.39,3412.4 D16.2
NetDB1_2: DB1.2 L3.1 R3.2 | length 525
  Top Layer w70: L3.1 3461.61,1897.64 3654.92,2090.94 ; R3.2@3654.92,2035.43 3654.92,2090.94 ; 3654.92,2125.98 3654.92,2090.94 ; DB1.2 3654.92,2090.94
NetDB1_3: DB1.3 L2.3 | length 222.3
  Top Layer w60: DB1.3 3507.23,2218.84 3507.23,2340.89 L2.3
NetDB1_4: DB1.4 L2.2 | length 228.6
  Top Layer w60: L2.2 3354.92,2315.35 DB1.4@3354.92,2219.8
NetF1_1: F1.1 J5.4 | length 430.7
  Top Layer w80: J5.4 F1.1
NetIC1_1: IC1.1 IC1.3 R9.1 | length 260.5
  Top Layer w25: IC1.1 3496.95,857.18 3496.95,803.15 ; R9.1 3496.95,736.32 3496.95,803.15 ; IC1.3 3596.85,828.15 3571.85,803.15 3496.95,803.15
NetJ1_1: J1.7 U7.2 | length 1029.9
  Top Layer w20: J1.7 515.63,2028.05 693.21,2205.63 945.63,2205.63 1180.91,2440.91 U7.2
NetJ1_3: J1.5 U6.2 | length 941.6
  Top Layer w20: J1.5 415.63,2028.05 648.21,2260.63 815.63,2260.63 987.89,2432.89 U6.2
NetJ1_5: J1.3 R46.2 U5.4 | length 828.1
  Top Layer w20: J1.3 315.63,2028.05 325.71,2038.13 333.13,2038.13 720.63,2425.63 720.63,2485.63 750.41,2515.41 784.97,2515.41 790.88,2521.32 790.88,2616.87 U5.4
NetJ1_7: J1.1 R58.1 | length 277.7
  Top Layer w20: R58.1 135.62,2175.64 215.63,2095.63 J1.1
NetJ2_2: J2.3 Q1.3 R8.2 | length 1709.2
  Top Layer w15: J2.3 v1(910.63,2090.63) ; R8.2@1859.19,1263.29 1872.5,1276.6 1922.27,1276.6 v1(1923.23,1277.56) 1927.89,1272.9 1997.66,1272.9 2000.98,1269.57 Q1.3
  Bottom Layer w15: v1(910.63,2090.63) 960.63,2040.63 960.63,1825.63 1508.7,1277.56 v1(1923.23,1277.56)
NetJ2_5: J2.5 Q2.3 R22.2 | length 2172.3
  Top Layer w15: J2.5 1010.63,1993.51 998.05,1980.93 980.93,1980.93 960.63,1960.63 960.63,1701.24 1077.49,1584.38 1481.57,1584.38 1706.63,1359.31 2411.19,1359.31 2473.4,1297.1 2473.4,1253.96 2470.07,1250.63 2430.63,1250.63 2409.87,1229.87 2395.31,1229.87 R22.2
NetJ2_7: J2.7 Q3.3 R36.2 | length 2394.6
  Top Layer w15: J2.7 1110.63,1993.51 1098.05,1980.93 1080.93,1980.93 1059.26,1959.26 1059.26,1735.21 1137.59,1656.88 1527.18,1656.88 1767.72,1416.34 2667.32,1416.34 2819.89,1263.77 R36.2 2861.7,1261.31 2947.33,1261.31 Q3.3
NetJ4_1: J4.1 K1.NC | length 533.5
  Top Layer w70: K1.NC 123.03,3171.12 195.63,3243.72 195.63,3593.86 J4.1
NetJ4_2: J4.2 K1.COM | length 1034.8
  Bottom Layer w70: K1.COM 319.88,3381.89 451.38,3513.39 J4.2
NetJ4_3: J4.3 K1.NO | length 536.1
  Bottom Layer w70: K1.NO 516.73,3338.93 651.38,3473.58 J4.3
NetJ4_6: J4.6 R51.2 R52.2 | length 1158.9
  Top Layer w30: J4.6 1357.68,3755.91 1646.65,3755.91 R52.2
  Top Layer w40: R51.2 831.69,3438.98 940.63,3547.91 940.63,3719.17 981.3,3759.84 1141.14,3759.84 J4.6
NetJ4_7: J4.7 R52.1 R55.2 | length 495.4
  Top Layer w30: J4.7@1458.58,3642.4 R52.1@1649.92,3642.4
  Top Layer w40: R55.2 1285.12,3437.68 1285.12,3483.35 J4.7 J4.7@1458.58,3642.4 ; R52.1@1649.92,3642.4 R52.1
NetJ5_1: J5.1 R11.2 R15.2 | length 404.8
  Top Layer w50: R11.2 R15.2
  Top Layer w70: R15.2@2107.28,405.51 2107.28,354.33 J5.1
NetJ5_2: J5.2 R23.2 R29.2 | length 326.8
  Top Layer w50: R23.2 R29.2
  Top Layer w70: J5.2 R29.2@2576.57,397.64
NetJ5_3: J5.3 R37.2 R41.2 | length 352.9
  Top Layer w50: R37.2 R41.2
  Top Layer w70: J5.3 2876.57,348.04 R37.2@2930.11,401.58
NetL2_4: L2.4 R1.2 | length 547.1
  Top Layer w60: L2.4 3575.79,3131.89 R1.2
NetQ4_1: Q4.1 R58.2 R59.2 | length 144.8
  Top Layer w15: R59.2@210.78,2331.22 Q4.1
  Top Layer w20: R58.2 205.62,2326.06 R59.2@210.78,2331.22
NetQ4_3: Q4.3 R57.1 | length 154.7
  Top Layer w25: Q4.3 411.06,2305.63 472.53,2367.11 472.53,2369.07 483.65,2380.2 R57.1
NetR5_2: R5.2 R6.1 U1.1 | length 182.8
  Top Layer w25: R6.1 2390.07,3106.99 2407.97,3106.99 2441.34,3073.62 U1.1
  Top Layer w30: R5.2 R6.1
NetR11_1: R11.1 R12.2 | length 78.7
  Top Layer w60: R11.1@1993.11,543.31 R12.2@1993.11,622.05
NetR12_1: R12.1 R13.2 | length 78.7
  Top Layer w60: R12.1@1993.11,755.91 R13.2@1993.11,834.65
NetR13_1: R13.1 R14.2 | length 82.7
  Top Layer w50: R14.2@1910.43,960.63 R13.1
NetR15_1: R15.1 R16.2 | length 78.7
  Top Layer w60: R15.1@2107.28,543.31 R16.2@2107.28,622.05
NetR16_1: R16.1 R17.2 | length 78.7
  Top Layer w60: R16.1@2107.28,759.84 R17.2@2107.28,838.58
NetR17_1: R17.1 R18.2 | length 82.7
  Top Layer w50: R17.1 R18.2@2189.96,960.63
NetR23_1: R23.1 R24.2 | length 78.7
  Top Layer w60: R23.1@2465.52,535.42 R24.2@2465.52,614.16
NetR24_1: R24.1 R25.2 | length 78.7
  Top Layer w60: R24.1@2465.52,748.02 R25.2@2465.52,826.76
NetR25_1: R25.1 R26.2 | length 82.7
  Top Layer w50: R26.2@2382.85,952.75 R25.1
NetR29_1: R29.1 R30.2 | length 78.7
  Top Layer w60: R29.1@2579.7,535.42 R30.2@2579.7,614.16
NetR30_1: R30.1 R31.2 | length 78.7
  Top Layer w60: R30.1@2579.7,751.96 R31.2@2579.7,830.7
NetR31_1: R31.1 R32.2 | length 82.7
  Top Layer w50: R31.1 R32.2@2662.37,952.75
NetR37_1: R37.1 R38.2 | length 78.7
  Top Layer w60: R37.1@2941.91,535.42 R38.2@2941.91,614.16
NetR38_1: R38.1 R39.2 | length 78.7
  Top Layer w60: R38.1@2941.91,748.02 R39.2@2941.91,826.76
NetR39_1: R39.1 R40.2 | length 82.7
  Top Layer w50: R40.2@2859.24,952.75 R39.1
NetR41_1: R41.1 R42.2 | length 78.7
  Top Layer w60: R41.1@3056.09,535.42 R42.2@3056.09,614.16
NetR42_1: R42.1 R43.2 | length 78.7
  Top Layer w60: R42.1@3056.09,751.96 R43.2@3056.09,830.7
NetR43_1: R43.1 R44.2 | length 82.7
  Top Layer w50: R43.1 R44.2@3138.76,952.75
NetR47_1: R47.1 U5.1 | length 157.4
  Top Layer w20: R47.1 715.54,2995.2 790.45,2920.29 790.45,2871.76 U5.1
NetR48_2: R48.2 U6.1 | length 96.2
  Top Layer w20: R48.2 887.76,2521.2 887.76,2616.99 U6.1
NetR53_2: R53.2 U7.1 | length 96.2
  Top Layer w20: R53.2 1080.76,2521.2 1080.76,2616.99 U7.1
NetU1_4: U1.4 U2.1 | length 404.5
  Top Layer w20: U2.1 2525.73,2828.69 2581.64,2828.69 2654.53,2901.57 2654.53,3063.09 2666.24,3074.8 2690.16,3074.8 2690.64,3074.31 2730.6,3074.31 U1.4@2731.09,3074.8
RS485_A: C29.2 D11.1 D13.1 IC2.6 R50.1 R51.1 | length 1083
  Top Layer w25: R50.1 v1@953.74,3338.58 ; R51.1 953.74,3417.32 v1(953.74,3338.58) ; IC2.6 970.87,3278.15 956.49,3292.53 956.49,3335.83 v1(953.74,3338.58) ; C29.2 1257.82,3156.56 1324.7,3156.56 v1(1325.63,3155.63) 1381.89,3211.89 D13.1 D11.1@1265.63,3326.77
  Bottom Layer w25: v1(953.74,3338.58) 1136.69,3155.63 v1(1325.63,3155.63)
RS485_B: C30.2 D11.2 D14.1 IC2.7 R55.1 R56.2 | length 923.7
  Top Layer w20: R56.2 R56.2@1097.44,3427.17 ; R55.1@1166.34,3427.17 1223.43,3370.08 1335.63,3370.08 1381.89,3416.34 D14.1 ; R55.1 1182.24,3421.1 1182.24,3328.58 D11.2
  Top Layer w25: IC2.7 920.87,3184.94 932.58,3173.23 1071.85,3173.23 1091.54,3192.91 C30.2 R56.2 ; R56.2@1097.44,3427.17 R55.1@1166.34,3427.17
pads on no net: IC1.5 IC1.6 IC1.7 J1.11 J1.12 J1.13 J1.14 J1.15 J1.16 J1.17 J1.18 J1.19 J1.20 J1.21 J1.22 J2.11 J2.12 J2.13 J2.14 J2.15 J2.16 J2.17 J2.18 J2.19 J2.20 J2.21 J2.22 J4.4 J6.2

## Polygon pours and split planes (outlines as drawn)
GND on Top Layer "NONET_L-01_P-001" (solid, remove dead copper, pour order 3): -1.6,2502.61 1848.4,2502.61 1848.4,1482.61 -1.6,1482.61
GND_RS485 on Top Layer "NONET_L-01_P-001" (solid, remove dead copper, pour order 2): 915.83,3838.19 915.83,3408.94 795.63,3288.74 795.63,2793.19 1160.83,2793.19 1585.83,3218.19 1725.83,3218.19 1915.83,3408.19 2250.83,3408.19 2250.83,3838.19
GND on Bottom Layer "NONET_L-01_P-001" (solid, remove dead copper, pour order 0): 0.63,2505.63 1850.63,2505.63 1850.63,1485.63 0.63,1485.63
GND_RS485 on Bottom Layer "NONET_L-01_P-001" (solid, remove dead copper, pour order 4): 915.63,3835.63 915.63,3401.85 795.63,3281.85 795.63,2790.63 1160.63,2790.63 1585.63,3215.63 1725.63,3215.63 1915.63,3405.63 2250.63,3405.63 2250.63,3835.63

## Keep-outs
Keep-Out Layer:
  lines w5.91: 0,0 0,374.02 78.74,374.02 78.74,472.44 0,472.44 0,1870.08 78.74,1870.08 78.74,1968.5 0,1968.5 0,3366.14 78.74,3366.14 78.74,3464.57 0,3464.57 0,3838.58 3838.58,3838.58 3838.58,3464.57 3759.84,3464.57 3759.84,3366.14 3838.58,3366.14 3838.58,1968.5 3759.84,1968.5 3759.84,1870.08 3838.58,1870.08 3838.58,472.44 3759.84,472.44 3759.84,374.02 3838.58,374.02 3838.58,0 0,0
  lines w40: 155.63,2565.63 495.63,2565.63 ; 2044.29,2263.78 2045.28,2759.84 ; 2955.63,3095.63 2955.63,2695.63 3110.63,2540.63 3725.63,2540.63

## Silkscreen, mask and mechanical layers (free items; w line width, h text height)
Top Overlay:
  region: 131 vertices and 2 holes, not listed, extent 3346.93,1299.75 3690.29,1643.11
  lines w5.91: 2685.63,2085.63 2685.63,2470.47 ; 2685.63,2470.47 2686.02,2470.47 2685.63,2470.47

## Text inside footprints (layer, text, board x,y; h text height)
C4: Top Overlay "+" at 2951.26,1857.28 h70 r90
CT1: Top Overlay "IN" at 1323.39,605.83 h70 r90
CT2: Top Overlay "IN" at 837.17,605.83 h70 r90
CT3: Top Overlay "IN" at 350.94,605.83 h70 r90